# Altium PCB PCB1.PcbDoc
Units mm, origin at the board's own origin, x right, y up, seen from the top; angles counter-clockwise.
Board outline 82.87 x 62.41 mm, 2 copper layers (Top Layer, Bottom Layer); 22 components, 8 nets, 46 pads, 0 vias.
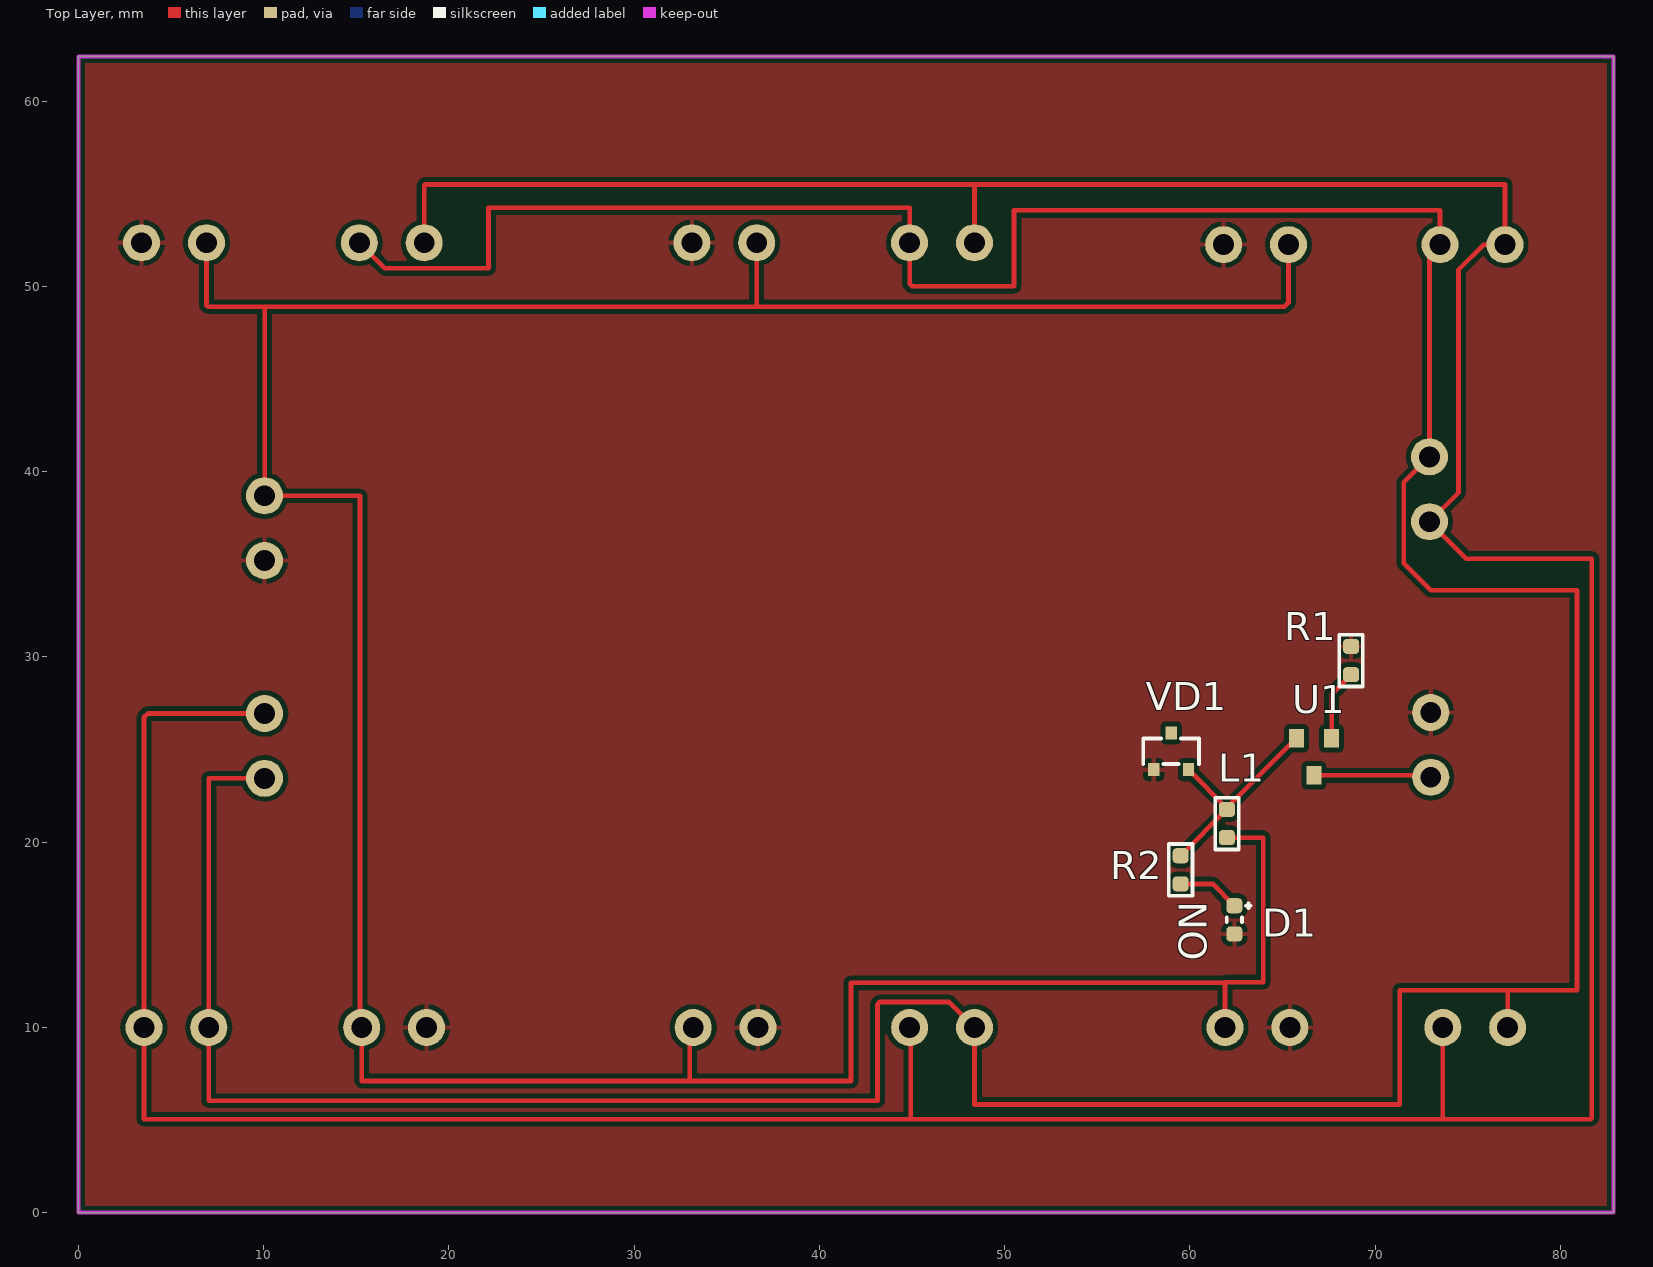
[diagram p0: Top Layer view]
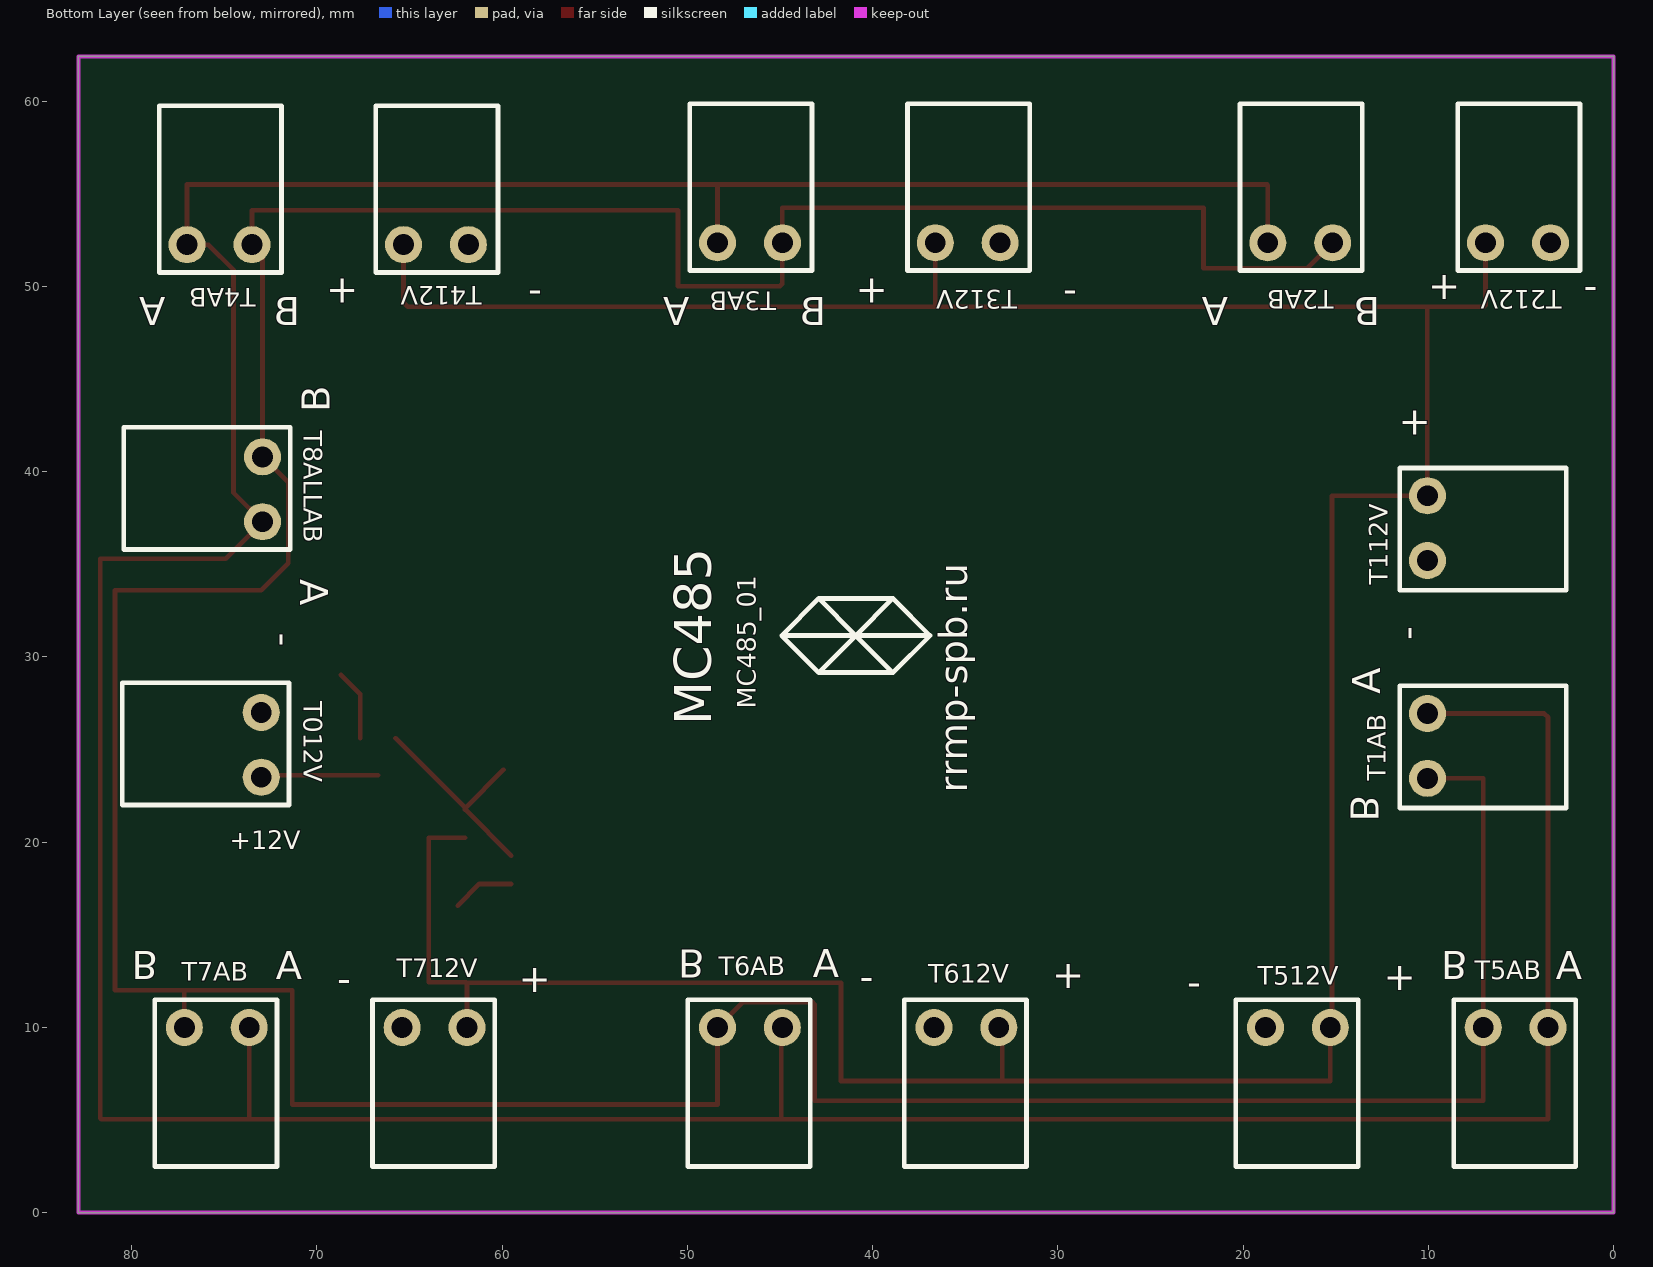
[diagram p1: Bottom Layer view, seen from below]
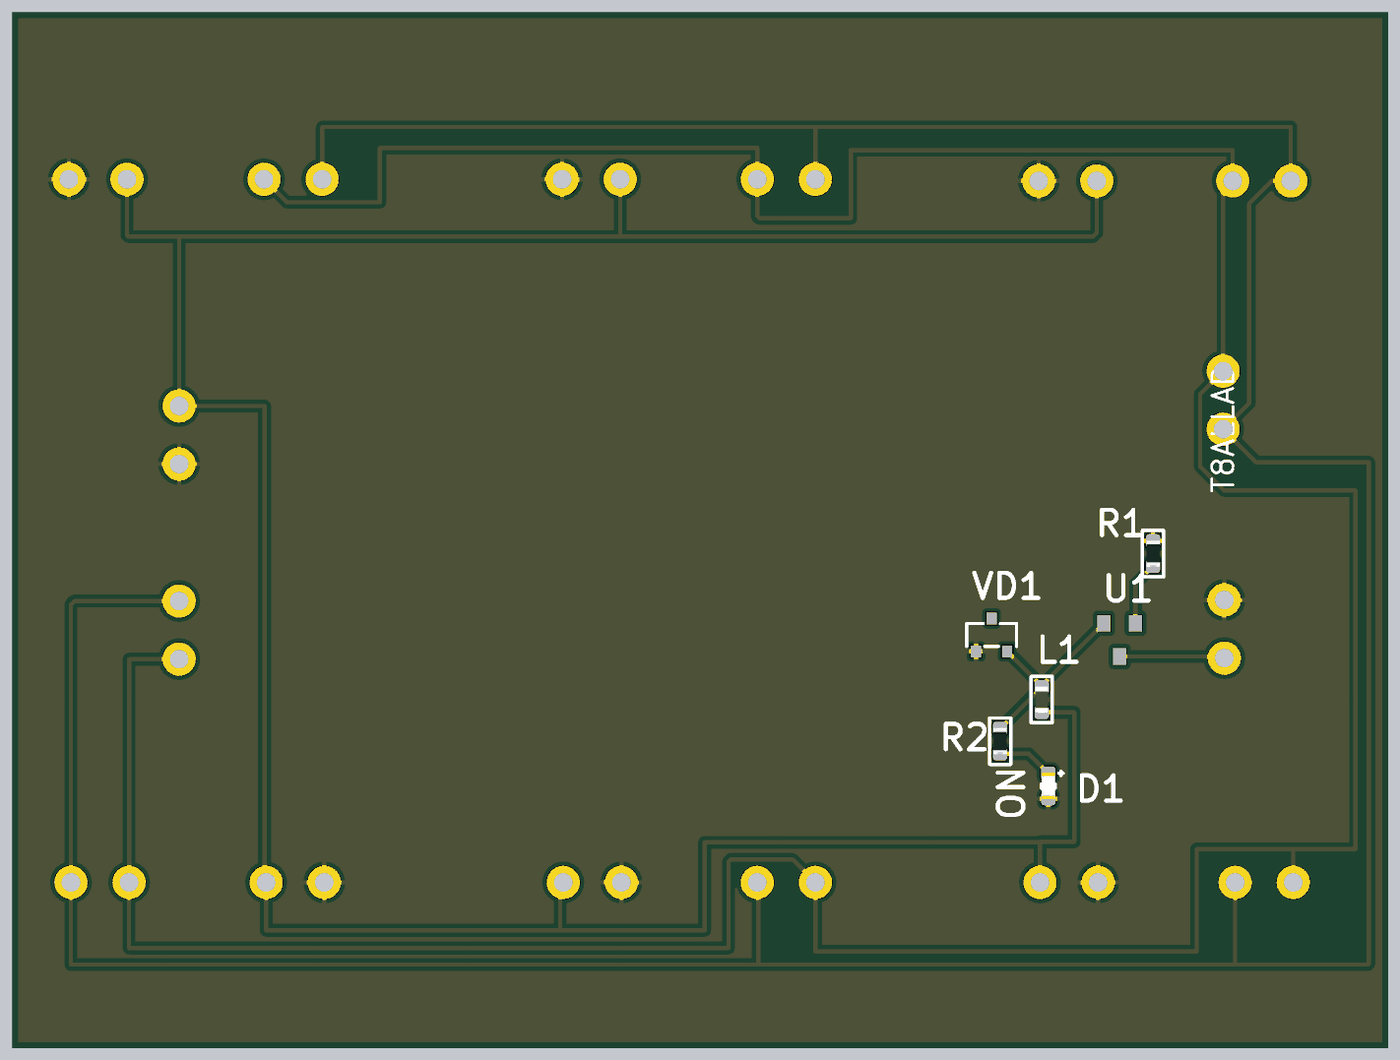
[diagram p2: 3D render of the assembled board from above, using the file's embedded part models]
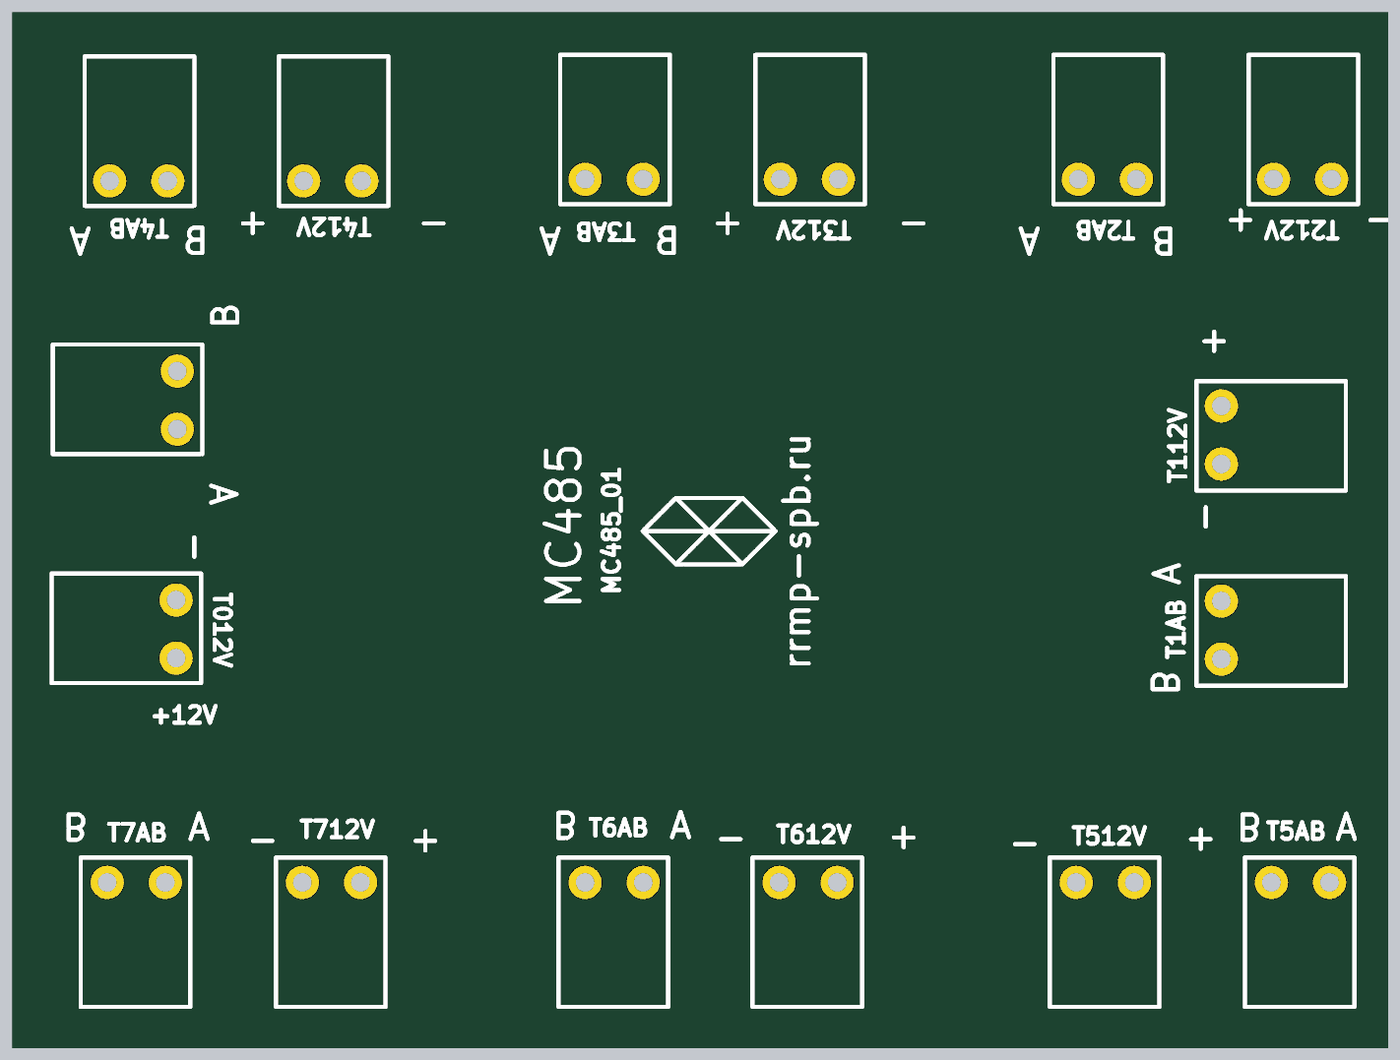
[diagram p3: 3D render of the assembled board from below, using the file's embedded part models]

## Layer stack, top to bottom
Top Solder: solder mask 0.0102, Solder Resist, Dk 3.5
Top Layer: signal copper 0.0356
Dielectric 1: dielectric 0.32, FR-4, Dk 4.8
Bottom Layer: signal copper 0.0356
Bottom Solder: solder mask 0.0102, Solder Resist, Dk 3.5

## Board outline
0,0 0,62.41 82.87,62.41 82.87,0

## Design rules (kind name [scope] priority, off if disabled: settings)
Clearance [All] p1: gap=0.254 ignorepadtopadclearanceinfootprint=FALSE except(0: Arc-Hole Track-Hole SMDPad-Hole THPad-Hole Via-Hole Fill-Hole Poly-Hole Region-Hole Text-Hole)
PolygonConnect [All] p1: connectstyle=Relief reliefconductorwidth=0.254 reliefentries=4 polygonreliefangle="90 Angle" airgapwidth=0.254
RoutingVias [All] p1: holewidth=0.711 width=1.27 viastyle="Through Hole" minholewidth=0.711 minwidth=1.27 maxholewidth=0.711 maxwidth=1.27
SolderMaskExpansion [All] p1: expansion=0.05
Width [All] p1: maxlimit=0.254 minlimit=0.254 preferedwidth=0.254
30 further rules are at their usual default settings.

## Classes and differential pairs
component class Sheet2: T1AB T2AB T3AB T4AB T5AB T6AB T7AB T8ALLAB
component class Sheet1: D1 L1 R1 R2 T012V T112V T212V T312V T412V T512V T612V T712V U1 VD1

## Components (designator, comment, footprint, x,y, rotation, side; value= is the part's Value field where it differs from the comment)
D1 "EL19-21UYC/S53" 0603_LED 62.4,15.8 r270 top
L1 "BLM18PG121" 0603ind 62,21 r90 top
R1 "47k" 0603_RES 68.7,29.8 r90 top
R2 "10k" 0603_RES 59.5,18.5 r90 top
T1AB "Terminal_2" TERMINAL_2_3.5 10.05,26.939 r270 bottom
T2AB "Terminal_2" TERMINAL_2_3.5 18.664,52.35 r180 bottom
T3AB "Terminal_2" TERMINAL_2_3.5 48.369,52.35 r180 bottom
T4AB "Terminal_2" TERMINAL_2_3.5 77.004,52.25 r180 bottom
T5AB "Terminal_2" TERMINAL_2_3.5 3.535,9.987 r0 bottom
T6AB "Terminal_2" TERMINAL_2_3.5 44.87,9.987 r0 bottom
T7AB "Terminal_2" TERMINAL_2_3.5 73.651,9.987 r0 bottom
T8ALLAB "Terminal_2" TERMINAL_2_3.5 72.929,37.293 r90 bottom
T012V "Terminal_0" TERMINAL_2_3.5 73,23.5 r90 bottom
T112V "Terminal_2" TERMINAL_2_3.5 10.05,38.694 r270 bottom
T212V "Terminal_2" TERMINAL_2_3.5 6.909,52.35 r180 bottom
T312V "Terminal_2" TERMINAL_2_3.5 36.614,52.35 r180 bottom
T412V "Terminal_2" TERMINAL_2_3.5 65.32,52.25 r180 bottom
T512V "Terminal_2" TERMINAL_2_3.5 15.29,9.987 r0 bottom
T612V "Terminal_2" TERMINAL_2_3.5 33.186,9.987 r0 bottom
T712V "Terminal_2" TERMINAL_2_3.5 61.896,9.987 r0 bottom
U1 "IRML9301" MICRO3_NORM 66.7,25.6 r180 top
VD1 "BZX84C12V" SOT23 59,24.9 r270 top

## Footprints (in the part's own frame and the unit in brackets; to place one, negate y for a bottom-side part, rotate by r counter-clockwise, add the part's x,y. Pads: shape width x height; smd on the part's side, far side on the other; paste and mask are expansions set on the pad)
0603_LED [mil] "http://www.vishay.com/docs/60031/m.pdf (Case 0603) http://www.yageo.com/pdf/NP0_50-to-500V_10.pdf (Case 0603)"
  rrect50% 32x34 smd mask+4: 1(30,0) 2(-30,0)
  silkscreen extent -35,-16 5,35, body extent -31,-16 32,16, height 43
0603_RES [mil]
  rrect50% 32x34 smd mask+4: 1(-30,0) 2(30,0)
  silkscreen extent -55,-25 55,25, body extent -31,-16 32,16, height 18
0603ind [mil]
  rrect50% 32x34 smd mask+4: 1(-30,0) 2(30,0)
  silkscreen extent -55,-25 55,25, body extent -31,-16 31,16, height 35
MICRO3_NORM [mm]
  rect 0.8x1 smd: 1(-0.95,0) 2(0.95,0) 3(0,2)
SOT23 [mil]
  rect 28x24 smd mask+4: 1(39.02,-37.57) 2(39.02,36.43) 3(-38.98,-0.57)
  silkscreen extent -27,-60 27,58, body extent -27,-60 27,58, height 39
TERMINAL_2_3.5 [mm] "15EDGRC-3.5-02"
  round 2 hole 1.125: 1(0,0) 2(3.5,0)
  silkscreen extent -1.5,-1.5 5.1,7.5, body extent -2.9,-1.75 6.3,9.55, height 7

## Part data
D1: library part LED, "Typical INFRARED GaAs LED", LatestRevisionDate=08-Jul-2005, LatestRevisionNote="Mech Layer 1 removed.", PackageReference=LED-0, Published=8-Jun-2000, Publisher="Altium Limited"
L1: library part L, "Inductor", Current=3000mA, ManufacturerName=Murata, ManufacturerPartNumber=BLM18PG121TN1D
R1 R2: library part R, "RC0603FR-0747kL"
T012V: library part Terminal_2
U1: library part IRML5203, "IRLML9301TRPBF"
VD1: library part DIODE_STAB_BZX84_GOST, "DIODE ZENER 12V 350MW SOT23-3", Current - Reverse Leakage @ Vr="100nA @ 8V", Manufacturer="Fairchild Semiconductor", Manufacturer Part Number=BZX84C12, Operating Temperature="-55°C ~ 150°C", Package / Case="TO-236-3, SC-59, SOT-23-3", Power - Max=350mW, Supplier Device Package="SOT-23-3 (TO-236)", Supplier Part Number 1=BZX84C12FSTR-ND, Tolerance=±5%, Voltage - Forward (Vf) (Max) @ If="900mV @ 10mA", Voltage - Zener (Nom) (Vz)=12V, Category="Discrete Semiconductor Products", ComponentLink1Description=http://www.fairchildsemi.com/ds/BZ/BZX84C10.pdf, ComponentLink1URL=http://www.fairchildsemi.com/ds/BZ/BZX84C10.pdf, Impedance (Max) (Zzt)="25 Ohm", Mounting Type="Surface Mount", Packaging="Tape & Reel (TR)", Part Number=BZX84C12, Pricing 1="3000=0.0357, 6000=0.0322, 15000=0.028 (USD)", RoHS="RoHS Compliant", Stock 1=12000, Supplier 1=Digi-Key

## Nets (pads, with @x,y where several pads share a name; then routed paths per layer and width w, separated by ;. In a path a pad name is that pad's centre, name@x,y a point inside that pad or via, vN(x,y) a via of type N, cw(c..) or ccw(c..) an arc to the next point about the centre after c; other vN are vias at no path point)
GND: D1.1 R1.2 T012V.2 T112V.2 T212V.2 T312V.2 T412V.2 T512V.2 T612V.2 T712V.2 VD1.1 | length 0.4
  Top Layer w0.254: T312V.2@32.8,52.036 T312V.2
NetD1_2: D1.2 R2.1 | length 3.4
  Top Layer w0.254: R2.1 61.224,17.738 D1.2
NetL1_1: L1.1 T112V.1 T212V.1 T312V.1 T412V.1 T512V.1 T612V.1 T712V.1 | length 184.6
  Top Layer w0.254: T212V.1 6.909,48.991 7,48.9 10.1,48.9 ; T612V.1 33,9.801 33,7.1 ; T312V.1 36.614,48.914 36.6,48.9 ; T712V.1 61.896,12.396 61.9,12.4 ; L1.1 63.962,20.238 63.962,12.438 61.938,12.438 61.9,12.4 ; T412V.1 65.32,49.12 65.1,48.9 36.6,48.9 ; 10.1,48.9 36.6,48.9 ; 10.1,48.9 10.05,48.85 T112V.1 15.194,38.694 15.194,10.083 T512V.1 15.29,7.11 15.3,7.1 33,7.1 ; 33,7.1 41.7,7.1 41.7,12.4 61.9,12.4
NetL1_2: L1.2 R2.2 U1.2 VD1.2 | length 11.9
  Top Layer w0.254: R2.2 L1.2 L1.2@62,21.834 ; VD1.2 L1.2@62,21.834 ; U1.2 62,21.85 L1.2@62,21.834
NetR1_1: R1.1 U1.1 | length 3.9
  Top Layer w0.254: U1.1 67.65,27.988 R1.1
NetT1AB_1: T1AB.1 T2AB.1 T3AB.1 T4AB.1 T5AB.1 T6AB.1 T7AB.1 T8ALLAB.1 | length 242.2
  Top Layer w0.254: T1AB.1 3.739,26.939 3.535,26.735 T5AB.1 3.535,5.035 44.935,5.035 ; T2AB.1 18.664,55.464 18.7,55.5 48.369,55.5 ; T6AB.1 44.935,9.922 44.935,5.035 ; T3AB.1 48.369,55.5 ; T7AB.1@72.887,9.987 T7AB.1 73.651,5.086 73.6,5.035 ; 44.935,5.035 73.6,5.035 ; 48.369,55.5 77,55.5 77.004,55.496 T4AB.1 75.85,52.25 74.5,50.9 74.5,38.864 T8ALLAB.1 74.922,35.3 81.7,35.3 81.7,5.1 81.635,5.035 73.6,5.035
NetT1AB_2: T1AB.2 T2AB.2 T3AB.2 T4AB.2 T5AB.2 T6AB.2 T7AB.2 T8ALLAB.2 | length 234.3
  Top Layer w0.254: T1AB.2 7.039,23.439 7.039,9.991 T5AB.2 7.035,6.035 43.135,6.035 43.135,11.235 43.268,11.368 46.989,11.368 T6AB.2 48.37,5.83 71.33,5.83 71.33,12 77.2,12 ; T2AB.2 16.545,50.969 22.139,50.969 22.139,54.239 44.869,54.239 T3AB.2 44.869,50.131 45,50 50.5,50 50.5,54.1 73.5,54.1 73.5,52.254 T4AB.2 72.929,51.675 T8ALLAB.2 71.548,39.412 71.548,35.052 73,33.6 80.9,33.6 80.9,12 77.2,12 ; T7AB.2 77.151,11.951 77.2,12
NetT012V_1: T012V.1 U1.3 | length 6.3
  Top Layer w0.254: U1.3 72.9,23.6 T012V.1
pads on no net: VD1.3

## Polygon pours and split planes (outlines as drawn)
GND on Top Layer "Top Layer-No Net" (solid, remove dead copper, pour order 4): 0,60.4 0,62.41 82.87,62.41 82.87,0 81.1,0 0,0

## Keep-outs
Keep-Out Layer:
  the board outline again, w0.2

## Silkscreen, mask and mechanical layers (free items; w line width, h text height)
Top Overlay:
  text "ON" at 60.9,13.6 h1.52 r90
Bottom Overlay:
  lines w0.254: 39.4,29.15 42.9,29.15 ; 42.4,29.15 38.9,29.15 ; 36.9,31.15 40.9,31.15 ; 36.9,31.15 38.9,29.15 ; 36.9,31.15 38.9,33.15 ; 38.9,29.15 40.9,31.15 ; 38.9,33.15 40.9,31.15 ; 38.9,33.15 42.9,33.15 ; 40.9,31.15 42.9,33.15 ; 40.9,31.15 44.9,31.15 ; 40.9,31.15 42.9,29.15 ; 42.9,29.15 44.9,31.15 ; 42.9,33.15 44.9,31.15
  text "B" at 12.6,49.4 h1.52 r180
  text "A" at 20.8,49.4 h1.52 r180
  text "A" at 51.3,49.4 h1.52 r180
  text "A" at 79.6,49.4 h1.52 r180
  text "-" at 1.6,49.3 h1.52
  text "+" at 10,49.3 h1.52
  text "-" at 29.7,49.1 h1.52
  text "+" at 40.9,49.1 h1.52
  text "-" at 58.6,49.1 h1.52
  text "+" at 69.5,49.1 h1.52
  text "B" at 42.5,47.9 h1.52
  text "B" at 70.9,47.9 h1.52
  text "B" at 69.3,43.2 h1.52 r270
  text "+" at 11.6,42 h1.52
  text "A" at 70.9,34.2 h1.52 r90
  text "-" at 72.5,31.3 h1.52 r90
  text "-" at 10.4,30.9 h1.52 r270
  text "A" at 12.6,29.4 h1.52 r270
  text "MC485_01" at 46.3,27.2 h1 r270
  text "MC485" at 48.7,26.3 h2 r270
  text "rrmp-spb.ru" at 34.9,22.65 h1.52 r270
  text "B" at 14.2,21.1 h1.52 r90
  text "+12V" at 74.7,19.6 h1
  text "B" at 50.5,14.2 h1.52 r180
  text "B" at 9.3,14.1 h1.52 r180
  text "B" at 80,14.1 h1.52 r180
  text "A" at 41.8,12.7 h1.52
  text "A" at 1.7,12.6 h1.52
  text "A" at 70.8,12.6 h1.52
  text "+" at 30.3,12.1 h1.52
  text "+" at 12.4,12 h1.52
  text "-" at 40.7,12 h1.52
  text "+" at 59.1,11.9 h1.52
  text "-" at 68.9,11.9 h1.52
  text "-" at 23,11.7 h1.52
Mechanical 15:
  the board outline again, w0.254